# EAGLE board ATmega328p-DHT11-DS1307-LCD-StripBd (EAGLE 9.2.2)
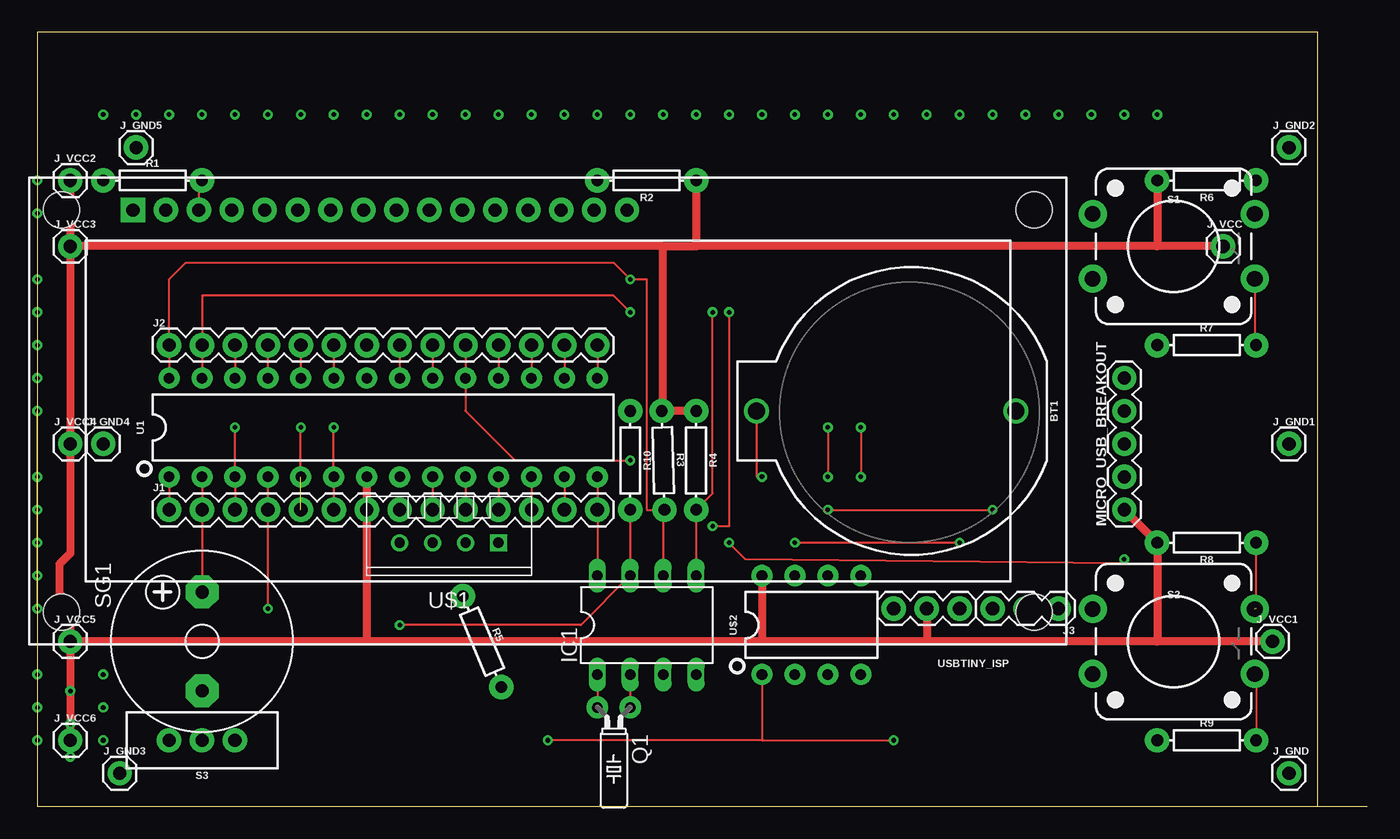
[diagram p0: board, top side]
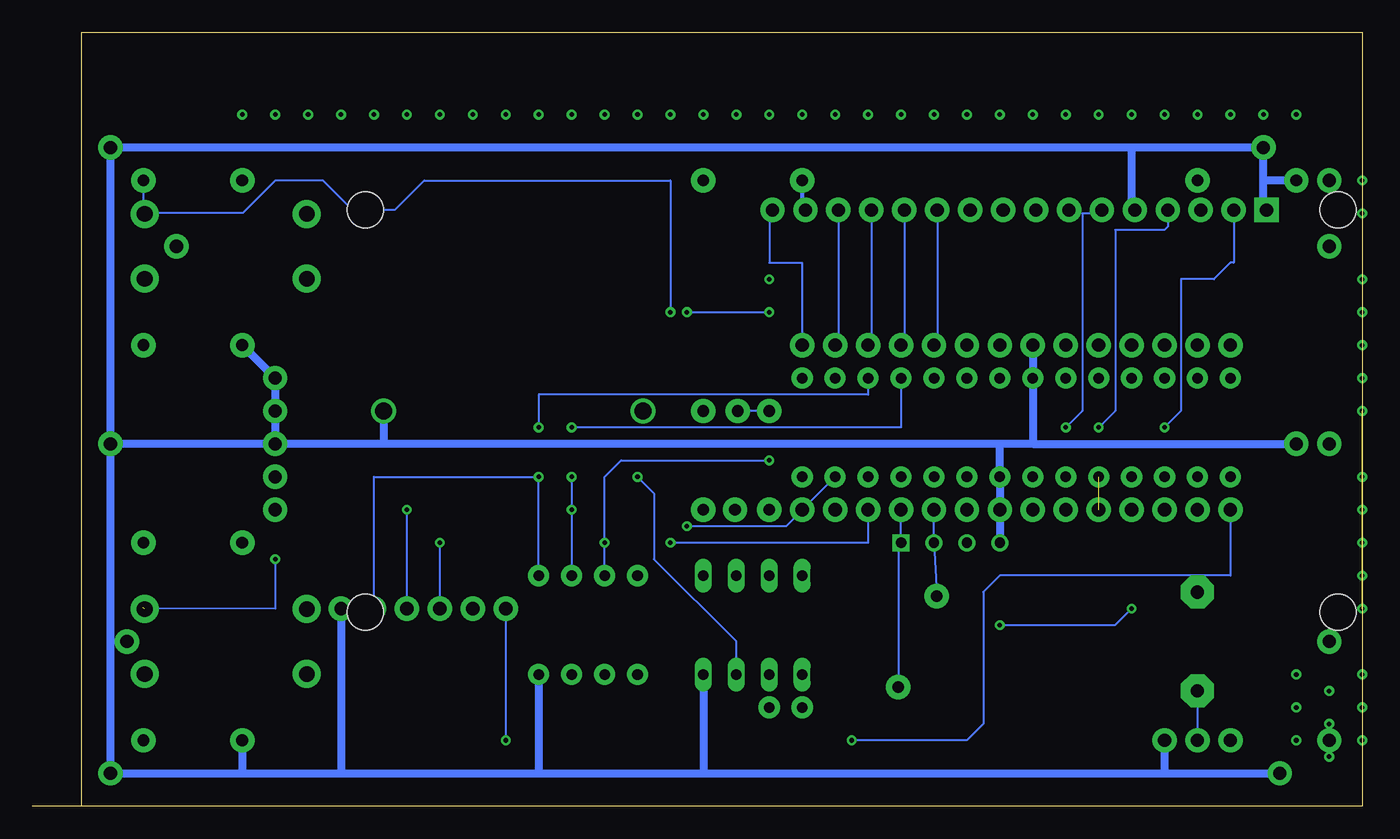
[diagram p1: board, bottom side, seen from below]

Size 102.54 x 59.68 mm. Coordinates in mm from the lower left corner, seen from the top.
Outline: 98.73,0 98.73,59.68 0,59.68 0,0 98.73,0
Outline: 98.73,0 102.54,0
Outline: 3.81,0 101.27,0
Copper layers (1*16): Top 0.035mm / dielectric 1.5mm / Bottom 0.035mm
Design rules "default": minimum track width 6mil, minimum drill 0.35mm, track to track 6mil, track to pad 6mil, pad to pad 6mil, via to via 6mil, smd to smd 6mil, copper to edge 40mil, drill to drill 6mil, minimum pad ring 10mil, minimum via ring 8mil, stop-mask expansion 4mil, vias tented up to drill 0mil, thermal gap 10mil

## Footprints (pad centres in the part's own frame; a part is rotated, then mirrored left to right if it is on the bottom)
BATTCOM_20MM_PTH = drill 1.3: 1 11.85,0; 2 -8.15,0
DIL08 = drill 0.813 long: 1 -3.81,-3.81; 2 -1.27,-3.81; 3 1.27,-3.81; 4 3.81,-3.81; 5 3.81,3.81; 6 1.27,3.81; 7 -1.27,3.81; 8 -3.81,3.81
1X14 = drill 1.016 pad 1.88: 1 0,0; 2 2.54,0; 3 5.08,0; 4 7.62,0; 5 10.16,0; 6 12.7,0; 7 15.24,0; 8 17.78,0; 9 20.32,0; 10 22.86,0; 11 25.4,0; 12 27.94,0; 13 30.48,0; 14 33.02,0
1X03 = drill 1.016 pad 1.88: 1 0,0; 2 2.54,0; 3 5.08,0
1X01 = drill 1.016 pad 1.88: 1 0,0
LCD-16X2 = drill 1.016 pad 1.88 square: 1 -32,15.5 | drill 1.016 pad 1.88: 2 -29.46,15.5; 3 -26.92,15.5; 4 -24.38,15.5; 5 -21.84,15.5; 6 -19.3,15.5; 7 -16.76,15.5; 8 -14.22,15.5; 9 -11.68,15.5; 10 -9.14,15.5; 11 -6.6,15.5; 12 -4.06,15.5; 13 -1.52,15.5; 14 1.02,15.5; 15 3.56,15.5; 16 6.1,15.5 | hole 2.8: -37.5,15.5; -37.5,-15.5; 37.5,15.5; 37.5,-15.5
1X05 = drill 1.016 pad 1.88: 1 0,0; 2 2.54,0; 3 5.08,0; 4 7.62,0; 5 10.16,0
TC26H = drill 0.813 pad 1.676: 1 -1.27,0; 2 1.27,0
AXIAL-0.3 = drill 0.9 pad 1.88: P$1 -3.81,0; P$2 3.81,0
TACTILE_SWITCH_PTH_12MM = drill 1.2 pad 2.159: 1 6.25,-2.5; 2 -6.25,-2.5; 3 6.25,2.5; 4 -6.25,2.5
SWITCH_SPDT_PTH_11.6X4.0MM = drill 1.016 pad 1.88: 1 0,2.54; 2 0,0; 3 0,-2.54
F/CM12P = drill 1.016 pad 2.54 octagon: + 3.81,0; - -3.81,0
DIP28 = drill 0.813 pad 1.626: 1 -16.51,-3.81; 2 -13.97,-3.81; 3 -11.43,-3.81; 4 -8.89,-3.81; 5 -6.35,-3.81; 6 -3.81,-3.81; 7 -1.27,-3.81; 8 1.27,-3.81; 9 3.81,-3.81; 10 6.35,-3.81; 11 8.89,-3.81; 12 11.43,-3.81; 13 13.97,-3.81; 14 16.51,-3.81; 15 16.51,3.81; 16 13.97,3.81; 17 11.43,3.81; 18 8.89,3.81; 19 6.35,3.81; 20 3.81,3.81; 21 1.27,3.81; 22 -1.27,3.81; 23 -3.81,3.81; 24 -6.35,3.81; 25 -8.89,3.81; 26 -11.43,3.81; 27 -13.97,3.81; 28 -16.51,3.81
TEMP-HUM-SENSOR-DHT11 = drill 0.8 square: 1 -3.81,0 | drill 0.8: 2 -1.27,0; 3 1.27,0; 4 3.81,0
DIP08_MCU = drill 0.813 pad 1.626: 1 -3.81,-3.81; 2 -1.27,-3.81; 3 1.27,-3.81; 4 3.81,-3.81; 5 3.81,3.81; 6 1.27,3.81; 7 -1.27,3.81; 8 -3.81,3.81

## Placement (x,y rotation side)
BT1  [BATTCOM_20MM_PTH]  67.31,30.48 180 top
IC1  DS1307  [DIL08]  46.99,13.97 0 top
J1  [1X14]  10.16,22.86 0 top
J2  [1X14]  10.16,35.56 0 top
J3  455-1750-1-ND  [1X03]  78.74,15.24 180 top
J_GND  [1X01]  96.52,2.54 0 top
J_GND1  [1X01]  96.52,27.94 0 top
J_GND2  [1X01]  96.52,50.8 0 top
J_GND3  [1X01]  6.35,2.54 0 top
J_GND4  [1X01]  5.08,27.94 0 top
J_GND5  [1X01]  7.62,50.8 0 top
J_VCC  [1X01]  91.44,43.18 0 top
J_VCC1  [1X01]  95.25,12.7 0 top
J_VCC2  [1X01]  2.54,48.26 0 top
J_VCC3  [1X01]  2.54,43.18 0 top
J_VCC4  [1X01]  2.54,27.94 0 top
J_VCC5  [1X01]  2.54,12.7 0 top
J_VCC6  [1X01]  2.54,5.08 0 top
LCD1  LCD-16X2SILK  [LCD-16X2]  39.37,30.48 0 top
MICRO_USB_BREAKOUT  [1X05]  83.82,22.86 90 top
Q1  [TC26H]  44.45,7.62 180 top
R1  2K2  [AXIAL-0.3]  8.89,48.26 0 top
R2  220  [AXIAL-0.3]  46.99,48.26 180 top
R3  10K  [AXIAL-0.3]  48.26,26.67 271.6 top
R4  10K  [AXIAL-0.3]  50.8,26.67 270 top
R5  5K1  [AXIAL-0.3]  34.29,12.7 292.9 top
R6  5K1  [AXIAL-0.3]  90.17,48.26 180 top
R7  100  [AXIAL-0.3]  90.17,35.56 0 top
R8  5K1  [AXIAL-0.3]  90.17,20.32 180 top
R9  100  [AXIAL-0.3]  90.17,5.08 0 top
R10  10K  [AXIAL-0.3]  45.72,26.67 270 top
S1  MOMENTARY-SWITCH-SPST-PTH-12MM  [TACTILE_SWITCH_PTH_12MM]  87.63,43.18 0 top
S2  MOMENTARY-SWITCH-SPST-PTH-12MM  [TACTILE_SWITCH_PTH_12MM]  87.63,12.7 0 top
S3  [SWITCH_SPDT_PTH_11.6X4.0MM]  12.7,5.08 90 top
SG1  F/CM12P  [F/CM12P]  12.7,12.7 90 top
U1  328P  [DIP28]  26.67,29.21 0 top
U$1  TEMP-HUM-SENSOR-DHT11  [TEMP-HUM-SENSOR-DHT11]  31.75,20.32 180 top
U$2  ATTINY13DIP  [DIP08_MCU]  59.69,13.97 0 top
USBTINY_ISP  455-1750-1-ND  [1X03]  71.12,15.24 180 top

## Library data of the parts
BT1 = SparkFun-Batteries; PROD_ID: BATT-09031; SF_SKU: PRT-00783
IC1 = adafruit
J1 J2 J_GND J_GND1-J_GND5 J_VCC J_VCC1-J_VCC6 MICRO_USB_BREAKOUT = SparkFun-Connectors
J3 USBTINY_ISP = SparkFun-Connectors; PROD_ID: XXX-00000
LCD1 = SparkFun-Displays; SF_ID: LCD-00255
Q1 = adafruit; OC_FARNELL: unknown; OC_NEWARK: unknown
R1-R10 = SparkFun-Resistors; PROD_ID: RES-08380
S1 S2 = SparkFun-Switches; PROD_ID: SWCH-09185; SF_SKU: COM-09190
S3 = SparkFun-Switches; PROD_ID: SWCH-08261; SF_SKU: COM-00102
SG1 = buzzer; OC_FARNELL: unknown; OC_NEWARK: unknown
U1 = SparkFun-IC-Microcontroller; PROD_ID: IC-09136
U$1 = diy-modules
U$2 = SparkFun-Retired

## Nets
A: LCD1.15 R2.P$2
AREF: J2.8 U1.21
AVCC: J2.9 U1.20
GND: BT1.2 IC1.4 J1.8 J2.7 J3.1 J_GND1.1 J_GND2.1 J_GND3.1 J_GND4.1 J_GND5.1 J_GND.1 LCD1.1 LCD1.5 MICRO_USB_BREAKOUT.5 R1.P$1 R7.P$1 R9.P$1 S3.3 U1.8 U1.22 U$1.4 U$2.4
N$2: S3.2 SG1.-
N$40: R7.P$2 S1.1
N$54: IC1.2 Q1.1
N$55: IC1.1 Q1.2
N$56: R9.P$2 S2.1
N$58: BT1.1 IC1.3
N.C.: U$1.3
PB0(ICP): IC1.8 J1.14 U1.14
PB1(OC1A): J2.14 LCD1.16 U1.15
PB2(SS/OC1B): J2.13 LCD1.14 U1.16
PB3(ADC3): U$2.2
PB3(MOSI/OC2)PB0(TINY8): J2.12 J3.2 LCD1.13 U1.17 U$2.5
PB4(ADC2): U$2.3
PB4(MISO)PB1(TINY8): J2.11 J3.3 LCD1.12 U1.18 U$2.6
PB5(SCK)PB2(TINY8): J2.10 LCD1.11 U1.19 U$2.7 USBTINY_ISP.1
PB6(XTAL1/TOSC1): J1.9 U1.9
PB7(XTAL2/TOSC2): J1.10 R5.P$1 U1.10 U$1.2
PC0(ADC0): J2.6 U1.23
PC1(ADC1): J2.5 U1.24
PC2(ADC2): J2.4 U1.25
PC3(ADC3): J2.3 U1.26
PC4(ADC4/SDA): IC1.5 J2.2 R4.P$2 U1.27
PC5(ADC5/SCL): IC1.6 J2.1 R3.P$2 U1.28
PC6(/RESET)PB5(TINY8): J1.1 U1.1 U$2.1 USBTINY_ISP.3
PD0(RXD): J1.2 SG1.+ U1.2
PD1(TXD): J1.3 LCD1.2 U1.3
PD2(INT0): IC1.7 J1.4 R10.P$2 U1.4
PD3(INT1): J1.5 LCD1.4 U1.5
PD4(XCK/T0): J1.6 LCD1.6 U1.6
PD5(T1): J1.11 R5.P$2 U1.11 U$1.1
PD6(AIN0): J1.12 R8.P$1 S2.3 U1.12
PD7(AIN1): J1.13 R6.P$1 S1.3 U1.13
VCC: J1.7 J_VCC1.1 J_VCC2.1 J_VCC3.1 J_VCC4.1 J_VCC5.1 J_VCC6.1 J_VCC.1 MICRO_USB_BREAKOUT.1 R2.P$1 R3.P$1 R4.P$1 R6.P$2 R8.P$2 R10.P$1 U1.7 U$2.8 USBTINY_ISP.2
VO: LCD1.3 R1.P$2

## Tracks (layer width: path | path; a pad name or v marks a point on that pad's centre or on a via)
A
  Bottom 0.305: R2.P$2 43.18,46.23 LCD1.15
AREF
  Top 0.152: J2.8 U1.21
AVCC
  Top 0.152: J2.9 U1.20
GND
  Bottom 0.61: J_GND1.1 J_GND.1 86.36,2.54 | J_GND1.1 J_GND2.1 17.78,50.8 | 50.8,2.54 15.24,2.54 | 15.24,2.54 J_GND3.1 | 86.36,2.54 78.74,2.54 | 78.74,2.54 63.5,2.54 | 63.5,2.54 50.8,2.54 | 17.78,50.8 J_GND5.1 7.62,48.26 | 25.4,27.94 J_GND4.1 | 25.4,27.94 27.94,27.94 | 27.94,27.94 75.46,27.94 | 75.46,27.94 83.82,27.94 | 83.82,27.94 J_GND1.1 | LCD1.1 7.62,45.98 7.62,48.26 | LCD1.5 17.78,45.98 17.78,50.8 | 27.94,27.94 U1.8 J1.8 U$1.4 | J2.7 U1.22 25.4,27.94 | BT1.2 75.46,27.94 | IC1.4 50.8,2.54 | R7.P$1 MICRO_USB_BREAKOUT.5 83.82,27.94 | R9.P$1 86.36,2.54 | U$2.4 63.5,2.54 | R1.P$1 7.62,48.26 | S3.3 15.24,2.54 | J3.1 78.74,2.54
N$1  (via drill 0.35)
  other vias: 0,10.16
N$2
  Bottom 0.152: SG1.- S3.2
N$3  (via drill 0.35)
  other vias: 43.18,53.34
N$4  (via drill 0.35)
  other vias: 45.72,53.34
N$5  (via drill 0.35)
  other vias: 12.7,53.34
N$6  (via drill 0.35)
  other vias: 10.16,53.34
N$7  (via drill 0.35)
  other vias: 7.62,53.34
N$8  (via drill 0.35)
  other vias: 5.08,53.34
N$9  (via drill 0.35)
  other vias: 0,5.08
N$10  (via drill 0.35)
  other vias: 15.24,53.34
N$11  (via drill 0.35)
  other vias: 0,33.02
N$12  (via drill 0.35)
  other vias: 0,35.56
N$13  (via drill 0.35)  (1 unrouted)
  other vias: 0,15.24 0,30.48
N$14  (via drill 0.35)
  other vias: 0,17.78
N$15  (via drill 0.35)
  other vias: 0,20.32
N$16  (via drill 0.35)
  other vias: 0,22.86
N$17  (via drill 0.35)
  other vias: 0,25.4
N$18  (via drill 0.35)
  other vias: 0,38.1
N$19  (via drill 0.35)
  other vias: 0,40.64
N$20  (via drill 0.35)
  other vias: 0,45.72
N$21  (via drill 0.35)
  other vias: 0,48.26
N$22  (via drill 0.35)
  other vias: 0,7.62
N$23  (via drill 0.35)
  other vias: 17.78,53.34
N$24  (via drill 0.35)
  other vias: 20.32,53.34
N$25  (via drill 0.35)
  other vias: 22.86,53.34
N$26  (via drill 0.35)
  other vias: 25.4,53.34
N$27  (via drill 0.35)
  other vias: 27.94,53.34
N$28  (via drill 0.35)
  other vias: 30.48,53.34
N$29  (via drill 0.35)
  other vias: 33.02,53.34
N$30  (via drill 0.35)
  other vias: 35.56,53.34
N$31  (via drill 0.35)
  other vias: 38.1,53.34
N$32  (via drill 0.35)
  other vias: 40.64,53.34
N$33  (via drill 0.35)
  other vias: 48.26,53.34
N$34  (via drill 0.35)
  other vias: 50.8,53.34
N$35  (via drill 0.35)
  other vias: 53.34,53.34
N$36  (via drill 0.35)
  other vias: 55.88,53.34
N$37  (via drill 0.35)
  other vias: 58.42,53.34
N$38  (via drill 0.35)
  other vias: 60.96,53.34
N$39  (via drill 0.35)
  other vias: 63.5,53.34
N$40
  Top 0.152: S1.1 93.88,35.66 R7.P$2
N$41  (via drill 0.35)
  other vias: 66.04,53.34
N$42  (via drill 0.35)
  other vias: 68.58,53.34
N$43  (via drill 0.35)
  other vias: 71.12,53.34
N$44  (via drill 0.35)
  other vias: 73.66,53.34
N$45  (via drill 0.35)
  other vias: 2.54,3.81
N$46  (via drill 0.35)
  other vias: 2.54,6.35
N$47  (via drill 0.35)
  other vias: 2.54,8.89
N$48  (via drill 0.35)
  other vias: 5.08,10.16
N$49  (via drill 0.35)
  other vias: 5.08,7.62
N$50  (via drill 0.35)
  other vias: 5.08,5.08
N$51  (via drill 0.35)
  other vias: 76.2,53.34
N$52  (via drill 0.35)
  other vias: 78.74,53.34
N$53  (via drill 0.35)
  other vias: 81.28,53.34
N$54
  Top 0.152: IC1.2 Q1.1
N$55
  Top 0.152: IC1.1 Q1.2
N$56
  Top 0.152: R9.P$2 93.98,10.1 S2.1
N$57  (via drill 0.35)
  other vias: 83.82,53.34
N$58  (via drill 0.35)
  Top 0.152: BT1.1 55.46,25.4 v55.88,25.4
  Bottom 0.152: IC1.3 48.26,12.7 54.61,19.05 54.61,24.13 v55.88,25.4
N$59  (via drill 0.35)
  other vias: 86.36,53.34
PB0(ICP)
  Top 0.152: U1.14 J1.14 IC1.8
PB1(OC1A)
  Top 0.152: J2.14 U1.15
  Bottom 0.152: LCD1.16 45.72,45.73 45.72,41.91 43.18,41.91 J2.14
PB2(SS/OC1B)
  Top 0.152: J2.13 U1.16
  Bottom 0.152: LCD1.14 40.39,35.81 J2.13
  Bottom 0.305: U1.16 40.39,33.27
PB3(MOSI/OC2)PB0(TINY8)  (via drill 0.35)
  Top 0.152: J2.12 U1.17 | v63.5,29.21 v63.5,25.4
  Bottom 0.152: LCD1.13 37.85,35.81 J2.12 | U1.17 38.1,31.75 63.5,31.75 v63.5,29.21 | U$2.5 v63.5,25.4 76.2,25.4 J3.2
  Bottom 0.305: U1.17 37.85,33.27
PB4(MISO)PB1(TINY8)  (via drill 0.35)
  Top 0.152: J2.11 U1.18 | v60.96,29.21 v60.96,25.4 | v60.96,22.86 v73.66,22.86
  Bottom 0.152: LCD1.12 35.31,35.81 J2.11 | U1.18 35.56,29.21 v60.96,29.21 | v60.96,25.4 v60.96,22.86 U$2.6 | J3.3 v73.66,22.86
  Bottom 0.305: U1.18 35.31,33.27
PB5(SCK)PB2(TINY8)  (via drill 0.35)
  Top 0.152: J2.10 U1.19 33.02,30.48 36.83,26.67 v45.72,26.67 | v71.12,20.32 v58.42,20.32
  Bottom 0.152: LCD1.11 32.77,35.81 J2.10 | U$2.7 v58.42,20.32 58.42,25.4 57.15,26.67 v45.72,26.67 | USBTINY_ISP.1 v71.12,20.32
  Bottom 0.305: U1.19 32.77,33.27
PB6(XTAL1/TOSC1)
  Top 0.152: U1.9 J1.9
PB7(XTAL2/TOSC2)
  Top 0.152: U1.10 J1.10
  Bottom 0.152: J1.10 U$1.2 R5.P$1
PC0(ADC0)
  Top 0.152: J2.6 U1.23
PC1(ADC1)
  Top 0.152: J2.5 U1.24
PC2(ADC2)
  Top 0.152: J2.4 U1.25
PC3(ADC3)
  Top 0.152: J2.3 U1.26
PC4(ADC4/SDA)  (via drill 0.35)
  Top 0.152: U1.27 J2.2 12.7,39.37 44.45,39.37 v45.72,38.1 | IC1.5 R4.P$2 52.07,24.13 v52.07,38.1
  Bottom 0.152: v52.07,38.1 v45.72,38.1
PC5(ADC5/SCL)  (via drill 0.35)
  Top 0.152: U1.28 J2.1 10.16,40.64 11.43,41.91 44.45,41.91 v45.72,40.64 46.99,40.64 46.99,22.86 48.26,22.86 | R3.P$2 48.26,22.86 | 48.26,22.86 IC1.6
  Bottom 0.152: 48.1,17.94 IC1.6
PC6(/RESET)PB5(TINY8)  (via drill 0.35)
  Top 0.152: U1.1 J1.1 | U$2.1 55.88,5.08 | 55.88,5.08 v39.37,5.08 | 55.88,5.08 v66.04,5.08
  Bottom 0.152: J1.1 10.16,17.78 27.94,17.78 29.21,16.51 29.21,6.35 30.48,5.08 v39.37,5.08 | USBTINY_ISP.3 v66.04,5.08
PD0(RXD)
  Top 0.152: U1.2 J1.2 SG1.+
PD1(TXD)  (via drill 0.35)
  Top 0.152: v15.24,29.21 U1.3 J1.3
  Bottom 0.152: 10.16,45.73 LCD1.2 9.91,41.91 10.16,41.91 11.43,40.64 13.97,40.64 13.97,30.48 v15.24,29.21
PD2(INT0)  (via drill 0.35)
  Top 0.152: U1.4 J1.4 v17.78,15.24 | R10.P$2 IC1.7 41.91,13.97 v27.94,13.97
  Bottom 0.152: v27.94,13.97 19.05,13.97 v17.78,15.24
PD3(INT1)  (via drill 0.35)  (1 unrouted)
  Top 0.152: U1.5 v20.32,29.21
  Bottom 0.152: 15.24,45.73 LCD1.4 14.99,44.7 15.24,44.45 19.05,44.45 19.05,30.48 v20.32,29.21
PD4(XCK/T0)  (via drill 0.35)
  Top 0.152: J1.6 U1.6 v22.86,29.21
  Bottom 0.152: LCD1.6 20.07,45.72 21.59,45.72 21.59,30.48 v22.86,29.21
PD5(T1)
  Top 0.152: U1.11 J1.11 35.77,22.86
  Bottom 0.152: R5.P$2 35.77,20.11 U$1.1 J1.11
PD6(AIN0)  (via drill 0.35)  (1 unrouted)
  Top 0.152: U1.12 J1.12 | 93.98,15.3 R8.P$1 | v53.34,20.32 54.61,19.05 83.5,18.73 v83.82,19.05
  Bottom 0.152: J1.12 38.1,20.32 v53.34,20.32 | v83.82,19.05 83.82,15.24 S2.3
PD7(AIN1)  (via drill 0.35)
  Top 0.152: U1.13 J1.13 | v53.34,38.1 53.34,21.59 v52.07,21.59
  Bottom 0.152: U1.13 44.45,21.59 v52.07,21.59 | v53.34,38.1 53.34,48.26 72.33,48.26 74.57,46.03 77.9,46.03 80.14,48.26 83.82,48.26 86.33,45.75 93.95,45.75 | R6.P$1 93.98,45.78 93.95,45.75 | S1.3 93.95,45.75
VCC
  Top 0.61: J_VCC5.1 J_VCC6.1 | 48.26,43.18 J_VCC3.1 | 48.26,43.18 50.8,43.18 | J_VCC.1 86.36,43.18 | 86.36,43.18 50.8,43.18 | 25.4,12.7 J_VCC5.1 | J_VCC1.1 86.36,12.7 | 86.36,12.7 68.58,12.7 | 68.58,12.7 55.88,12.7 | 55.88,12.7 25.4,12.7 | J_VCC3.1 J_VCC4.1 2.54,19.5 1.69,18.65 1.69,16.39 2.54,15.54 J_VCC5.1 | R2.P$1 50.8,43.18 | U1.7 J1.7 25.4,12.7 | 48.26,43.18 48.26,30.48 R3.P$1 R4.P$1 | J_VCC2.1 J_VCC3.1 | R6.P$2 86.36,43.18 | 86.36,12.7 R8.P$2 MICRO_USB_BREAKOUT.1 | U$2.8 55.88,12.7 | USBTINY_ISP.2 68.58,12.7
  Bottom 0.152: R10.P$1 R3.P$1
VO
  Top 0.152: R1.P$2 12.45,48.01 LCD1.3

## Text on the board
tValues: 1 2 3 4 5 | 6 7 8 9 10 | 1 2 3 4 5 | 6 7 8 9 20 | 1 2 3 4 5 | 6 7 8 9 30 | 1 2 3 4 35 | 36 | 1 2 | 1 2 3 4 5 | 1 2 3 4 5 | 1 2 3 4 5 | 1 2 3 | 1 2 3 4 5 | 6 7 8 9 10 | 1 2 3 4 5 | 6 7 8 9 20 | 1 2 3 4 5 | 6 7 8 9 30 | 1 2 3 4 35 | 36